# Altium PCB POETIC_Backplane_V2.PcbDoc (part 2 of 2)
Units mm, origin at the board's own origin, x right, y up, seen from the top; angles counter-clockwise.
Board outline 400 x 128 mm, 4 copper layers (Top Layer, Signal Layer 1, Internal Plane 1, Bottom Layer), stack 1.49 mm thick; 36 components, 76 nets, 998 pads, 2 vias.
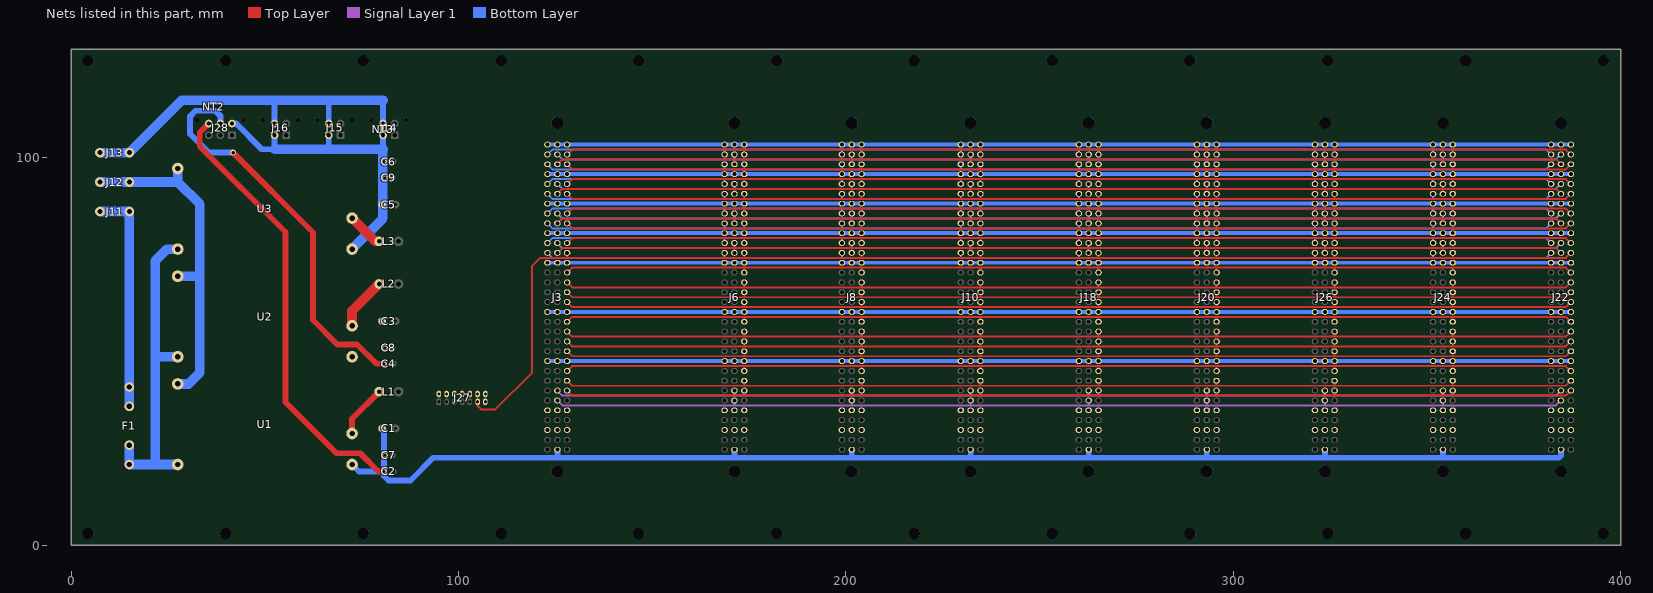
[diagram p4: the nets of this part, all layers, seen from the top]

## Via types
v1: diameter 1.27, hole 0.711, Top Layer to Bottom Layer, tented both sides, 1 vias
v2: diameter 1.5, hole 0.9, Top Layer to Bottom Layer, tented both sides, 1 vias

## Nets (pads, with @x,y where several pads share a name; then routed paths per layer and width w, separated by ;. In a path a pad name is that pad's centre, name@x,y a point inside that pad or via, vN(x,y) a via of type N, cw(c..) or ccw(c..) an arc to the next point about the centre after c; other vN are vias at no path point) (continued)
BP_GPIO_23: J3.B26 J6.B26 J8.B26 J10.B26 J18.B26 J20.B26 J22.B26 J24.B26 J26.B26 | length 268.9
  Signal Layer 1 w0.5: J3.B26@125.48,39.87 126.77,38.58 140.72,38.58 ; 141,38.58 171.2,38.58 ; J6.B26@171.2,39.87 171.2,38.58 ; J8.B26@201.48,39.87 201.48,38.58 ; J10.B26@232.16,39.87 232.16,38.58 ; J18.B26@262.64,39.87 262.64,38.58 ; J20.B26@293.12,39.87 293.12,38.58 ; J26.B26@323.6,39.87 323.6,38.58 ; J24.B26@354.08,39.87 354.08,38.58 ; J22.B26@384.56,39.87 383.27,38.58 354.08,38.58 ; 171.2,38.58 201.48,38.58 ; 201.48,38.58 232.16,38.58 ; 232.16,38.58 262.64,38.58 ; 262.64,38.58 293.12,38.58 ; 293.12,38.58 323.6,38.58 ; 323.6,38.58 354.08,38.58
BP_GPIO_24: J3.B27 J6.B27 J8.B27 J10.B27 J18.B27 J20.B27 J22.B27 J24.B27 J26.B27 | length 268.9
  Signal Layer 1 w0.5: J3.B27@125.48,37.33 126.77,36.04 140.72,36.04 ; 141,36.04 171.2,36.04 ; J6.B27@171.2,37.33 171.2,36.04 ; J8.B27@201.48,37.33 201.48,36.04 ; J10.B27@232.16,37.33 232.16,36.04 ; J18.B27@262.64,37.33 262.64,36.04 ; J20.B27@293.12,37.33 293.12,36.04 ; J26.B27@323.6,37.33 323.6,36.04 ; J24.B27@354.08,37.33 354.08,36.04 ; J22.B27@384.56,37.33 383.27,36.04 354.08,36.04 ; 171.2,36.04 201.48,36.04 ; 201.48,36.04 232.16,36.04 ; 232.16,36.04 262.64,36.04 ; 262.64,36.04 293.12,36.04 ; 293.12,36.04 323.6,36.04 ; 323.6,36.04 354.08,36.04
BP_GPIO_26: J3.C14 J6.C14 J8.C14 J10.C14 J18.C14 J20.C14 J22.C14 J24.C14 J26.C14 | length 269
  Top Layer w0.5: J3.C14@128.02,70.35 129.29,71.62 173.74,71.62 ; J6.C14@173.74,70.35 173.74,71.62 ; J8.C14@204.02,70.35 204.02,71.62 ; J10.C14@234.7,70.35 234.7,71.62 ; J18.C14@265.18,70.35 265.18,71.62 ; J20.C14@295.66,70.35 295.66,71.62 ; J26.C14@326.14,70.35 326.14,71.62 ; J24.C14@356.62,70.35 356.62,71.62 ; J22.C14@387.1,70.35 385.83,71.62 356.62,71.62 ; 173.74,71.62 204.02,71.62 ; 204.02,71.62 234.7,71.62 ; 234.7,71.62 265.18,71.62 ; 265.18,71.62 295.66,71.62 ; 295.66,71.62 326.14,71.62 ; 326.14,71.62 356.62,71.62
BP_GPIO_27: J3.C15 J6.C15 J8.C15 J10.C15 J18.C15 J20.C15 J22.C15 J24.C15 J26.C15 | length 269.2
  Top Layer w0.5: J3.C15@128.02,67.81 129.31,66.52 173.74,66.52 ; J6.C15@173.74,67.81 173.74,66.52 ; J8.C15@204.02,67.81 204.02,66.52 ; J10.C15@234.7,67.81 234.7,66.52 ; J18.C15@265.18,67.81 265.18,66.52 ; J20.C15@295.66,67.81 295.66,66.52 ; J26.C15@326.14,67.81 326.14,66.52 ; J24.C15@356.62,67.81 356.62,66.52 ; J22.C15@387.1,67.81 385.81,66.52 356.62,66.52 ; 173.74,66.52 204.02,66.52 ; 204.02,66.52 234.7,66.52 ; 234.7,66.52 265.18,66.52 ; 265.18,66.52 295.66,66.52 ; 295.66,66.52 326.14,66.52 ; 326.14,66.52 356.62,66.52
BP_GPIO_28: J3.C16 J6.C16 J8.C16 J10.C16 J18.C16 J20.C16 J22.C16 J24.C16 J26.C16 | length 269.2
  Top Layer w0.5: J3.C16@128.02,65.27 129.31,63.98 173.74,63.98 ; J6.C16@173.74,65.27 173.74,63.98 ; J8.C16@204.02,65.27 204.02,63.98 ; J10.C16@234.7,65.27 234.7,63.98 ; J18.C16@265.18,65.27 265.18,63.98 ; J20.C16@295.66,65.27 295.66,63.98 ; J26.C16@326.14,65.27 326.14,63.98 ; J24.C16@356.62,65.27 356.62,63.98 ; J22.C16@387.1,65.27 385.81,63.98 356.62,63.98 ; 173.74,63.98 204.02,63.98 ; 204.02,63.98 234.7,63.98 ; 234.7,63.98 265.18,63.98 ; 265.18,63.98 295.66,63.98 ; 295.66,63.98 326.14,63.98 ; 326.14,63.98 356.62,63.98
BP_GPIO_29: J3.C17 J6.C17 J8.C17 J10.C17 J18.C17 J20.C17 J22.C17 J24.C17 J26.C17 | length 269.2
  Top Layer w0.5: J3.C17@128.02,62.73 129.31,61.44 173.74,61.44 ; J6.C17@173.74,62.73 173.74,61.44 ; J8.C17@204.02,62.73 204.02,61.44 ; J10.C17@234.7,62.73 234.7,61.44 ; J18.C17@265.18,62.73 265.18,61.44 ; J20.C17@295.66,62.73 295.66,61.44 ; J26.C17@326.14,62.73 326.14,61.44 ; J24.C17@356.62,62.73 356.62,61.44 ; J22.C17@387.1,62.73 385.81,61.44 356.62,61.44 ; 173.74,61.44 204.02,61.44 ; 204.02,61.44 234.7,61.44 ; 234.7,61.44 265.18,61.44 ; 265.18,61.44 295.66,61.44 ; 295.66,61.44 326.14,61.44 ; 326.14,61.44 356.62,61.44
BP_GPIO_30: J3.C19 J6.C19 J8.C19 J10.C19 J18.C19 J20.C19 J22.C19 J24.C19 J26.C19 | length 269
  Top Layer w0.5: J3.C19@128.02,57.65 129.29,58.92 173.74,58.92 ; J6.C19@173.74,57.65 173.74,58.92 ; J8.C19@204.02,57.65 204.02,58.92 ; J10.C19@234.7,57.65 234.7,58.92 ; J18.C19@265.18,57.65 265.18,58.92 ; J20.C19@295.66,57.65 295.66,58.92 ; J26.C19@326.14,57.65 326.14,58.92 ; J24.C19@356.62,57.65 356.62,58.92 ; J22.C19@387.1,57.65 385.83,58.92 356.62,58.92 ; 173.74,58.92 204.02,58.92 ; 204.02,58.92 234.7,58.92 ; 234.7,58.92 265.18,58.92 ; 265.18,58.92 295.66,58.92 ; 295.66,58.92 326.14,58.92 ; 326.14,58.92 356.62,58.92
BP_GPIO_31: J3.C20 J6.C20 J8.C20 J10.C20 J18.C20 J20.C20 J22.C20 J24.C20 J26.C20 | length 269.2
  Top Layer w0.5: J3.C20@128.02,55.11 129.31,53.82 173.74,53.82 ; J6.C20@173.74,55.11 173.74,53.82 ; J8.C20@204.02,55.11 204.02,53.82 ; J10.C20@234.7,55.11 234.7,53.82 ; J18.C20@265.18,55.11 265.18,53.82 ; J20.C20@295.66,55.11 295.66,53.82 ; J26.C20@326.14,55.11 326.14,53.82 ; J24.C20@356.62,55.11 356.62,53.82 ; J22.C20@387.1,55.11 385.81,53.82 356.62,53.82 ; 173.74,53.82 204.02,53.82 ; 204.02,53.82 234.7,53.82 ; 234.7,53.82 265.18,53.82 ; 265.18,53.82 295.66,53.82 ; 295.66,53.82 326.14,53.82 ; 326.14,53.82 356.62,53.82
BP_GPIO_32: J3.C21 J6.C21 J8.C21 J10.C21 J18.C21 J20.C21 J22.C21 J24.C21 J26.C21 | length 269.2
  Top Layer w0.5: J3.C21@128.02,52.57 129.31,51.28 173.74,51.28 ; J6.C21@173.74,52.57 173.74,51.28 ; J8.C21@204.02,52.57 204.02,51.28 ; J10.C21@234.7,52.57 234.7,51.28 ; J18.C21@265.18,52.57 265.18,51.28 ; J20.C21@295.66,52.57 295.66,51.28 ; J26.C21@326.14,52.57 326.14,51.28 ; J24.C21@356.62,52.57 356.62,51.28 ; J22.C21@387.1,52.57 385.81,51.28 356.62,51.28 ; 173.74,51.28 204.02,51.28 ; 204.02,51.28 234.7,51.28 ; 234.7,51.28 265.18,51.28 ; 265.18,51.28 295.66,51.28 ; 295.66,51.28 326.14,51.28 ; 326.14,51.28 356.62,51.28
BP_GPIO_33: J3.C22 J6.C22 J8.C22 J10.C22 J18.C22 J20.C22 J22.C22 J24.C22 J26.C22 | length 269.2
  Top Layer w0.5: J3.C22@128.02,50.03 129.31,48.74 173.74,48.74 ; J6.C22@173.74,50.03 173.74,48.74 ; J8.C22@204.02,50.03 204.02,48.74 ; J10.C22@234.7,50.03 234.7,48.74 ; J18.C22@265.18,50.03 265.18,48.74 ; J20.C22@295.66,50.03 295.66,48.74 ; J26.C22@326.14,50.03 326.14,48.74 ; J24.C22@356.62,50.03 356.62,48.74 ; J22.C22@387.1,50.03 385.81,48.74 356.62,48.74 ; 173.74,48.74 204.02,48.74 ; 204.02,48.74 234.7,48.74 ; 234.7,48.74 265.18,48.74 ; 265.18,48.74 295.66,48.74 ; 295.66,48.74 326.14,48.74 ; 326.14,48.74 356.62,48.74
BP_GPIO_34: J3.C24 J6.C24 J8.C24 J10.C24 J18.C24 J20.C24 J22.C24 J24.C24 J26.C24 | length 269
  Top Layer w0.5: J3.C24@128.02,44.95 129.29,46.22 173.74,46.22 ; J6.C24@173.74,44.95 173.74,46.22 ; J8.C24@204.02,44.95 204.02,46.22 ; J10.C24@234.7,44.95 234.7,46.22 ; J18.C24@265.18,44.95 265.18,46.22 ; J20.C24@295.66,44.95 295.66,46.22 ; J26.C24@326.14,44.95 326.14,46.22 ; J24.C24@356.62,44.95 356.62,46.22 ; J22.C24@387.1,44.95 385.83,46.22 356.62,46.22 ; 173.74,46.22 204.02,46.22 ; 204.02,46.22 234.7,46.22 ; 234.7,46.22 265.18,46.22 ; 265.18,46.22 295.66,46.22 ; 295.66,46.22 326.14,46.22 ; 326.14,46.22 356.62,46.22
BP_GPIO_35: J3.C25 J6.C25 J8.C25 J10.C25 J18.C25 J20.C25 J22.C25 J24.C25 J26.C25 | length 269.2
  Top Layer w0.5: J3.C25@128.02,42.41 129.31,41.12 173.74,41.12 ; J6.C25@173.74,42.41 173.74,41.12 ; J8.C25@204.02,42.41 204.02,41.12 ; J10.C25@234.7,42.41 234.7,41.12 ; J18.C25@265.18,42.41 265.18,41.12 ; J20.C25@295.66,42.41 295.66,41.12 ; J26.C25@326.14,42.41 326.14,41.12 ; J24.C25@356.62,42.41 356.62,41.12 ; J22.C25@387.1,42.41 385.81,41.12 356.62,41.12 ; 173.74,41.12 204.02,41.12 ; 204.02,41.12 234.7,41.12 ; 234.7,41.12 265.18,41.12 ; 265.18,41.12 295.66,41.12 ; 295.66,41.12 326.14,41.12 ; 326.14,41.12 356.62,41.12
BP_GPIO_36: J3.C26 J6.C26 J8.C26 J10.C26 J18.C26 J20.C26 J22.C26 J24.C26 J26.C26 | length 269.2
  Top Layer w0.5: J3.C26@128.02,39.87 129.31,38.58 173.74,38.58 ; J6.C26@173.74,39.87 173.74,38.58 ; J8.C26@204.02,39.87 204.02,38.58 ; J10.C26@234.7,39.87 234.7,38.58 ; J18.C26@265.18,39.87 265.18,38.58 ; J20.C26@295.66,39.87 295.66,38.58 ; J26.C26@326.14,39.87 326.14,38.58 ; J24.C26@356.62,39.87 356.62,38.58 ; J22.C26@387.1,39.87 385.81,38.58 356.62,38.58 ; 173.74,38.58 204.02,38.58 ; 204.02,38.58 234.7,38.58 ; 234.7,38.58 265.18,38.58 ; 265.18,38.58 295.66,38.58 ; 295.66,38.58 326.14,38.58 ; 326.14,38.58 356.62,38.58
BP_PWM1A: J3.A2 J6.A2 J8.A2 J10.A2 J18.A2 J20.A2 J22.A2 J24.A2 J26.A2 | length 268.9
  Bottom Layer w0.5: J3.A2@122.94,100.83 124.19,102.08 168.66,102.08 ; J6.A2@168.66,100.83 168.66,102.08 ; J8.A2@198.94,100.83 198.94,102.08 ; J10.A2@229.62,100.83 229.62,102.08 ; J18.A2@260.1,100.83 260.1,102.08 ; J20.A2@290.58,100.83 290.58,102.08 ; J26.A2@321.06,100.83 321.06,102.08 ; J24.A2@351.54,100.83 351.54,102.08 ; J22.A2@382.02,100.83 380.77,102.08 351.54,102.08 ; 168.66,102.08 198.94,102.08 ; 198.94,102.08 229.62,102.08 ; 229.62,102.08 260.1,102.08 ; 260.1,102.08 290.58,102.08 ; 290.58,102.08 321.06,102.08 ; 321.06,102.08 351.54,102.08
BP_PWM1B: J3.A3 J6.A3 J8.A3 J10.A3 J18.A3 J20.A3 J22.A3 J24.A3 J26.A3 | length 269.2
  Bottom Layer w0.5: J3.A3@122.94,98.29 124.23,97 168.66,97 ; J6.A3@168.66,98.29 168.66,97 ; J8.A3@198.94,98.29 198.94,97 ; J10.A3@229.62,98.29 229.62,97 ; J18.A3@260.1,98.29 260.1,97 ; J20.A3@290.58,98.29 290.58,97 ; J26.A3@321.06,98.29 321.06,97 ; J24.A3@351.54,98.29 351.54,97 ; J22.A3@382.02,98.29 380.73,97 351.54,97 ; 168.66,97 198.94,97 ; 198.94,97 229.62,97 ; 229.62,97 260.1,97 ; 260.1,97 290.58,97 ; 290.58,97 321.06,97 ; 321.06,97 351.54,97
BP_PWM2A: J3.A5 J6.A5 J8.A5 J10.A5 J18.A5 J20.A5 J22.A5 J24.A5 J26.A5 | length 268.9
  Bottom Layer w0.5: J3.A5@122.94,93.21 124.19,94.46 168.66,94.46 ; J6.A5@168.66,93.21 168.66,94.46 ; J8.A5@198.94,93.21 198.94,94.46 ; J10.A5@229.62,93.21 229.62,94.46 ; J18.A5@260.1,93.21 260.1,94.46 ; J20.A5@290.58,93.21 290.58,94.46 ; J26.A5@321.06,93.21 321.06,94.46 ; J24.A5@351.54,93.21 351.54,94.46 ; J22.A5@382.02,93.21 380.77,94.46 351.54,94.46 ; 168.66,94.46 198.94,94.46 ; 198.94,94.46 229.62,94.46 ; 229.62,94.46 260.1,94.46 ; 260.1,94.46 290.58,94.46 ; 290.58,94.46 321.06,94.46 ; 321.06,94.46 351.54,94.46
BP_PWM2B: J3.A6 J6.A6 J8.A6 J10.A6 J18.A6 J20.A6 J22.A6 J24.A6 J26.A6 | length 269.2
  Bottom Layer w0.5: J3.A6@122.94,90.67 124.23,89.38 168.66,89.38 ; J6.A6@168.66,90.67 168.66,89.38 ; J8.A6@198.94,90.67 198.94,89.38 ; J10.A6@229.62,90.67 229.62,89.38 ; J18.A6@260.1,90.67 260.1,89.38 ; J20.A6@290.58,90.67 290.58,89.38 ; J26.A6@321.06,90.67 321.06,89.38 ; J24.A6@351.54,90.67 351.54,89.38 ; J22.A6@382.02,90.67 380.73,89.38 351.54,89.38 ; 168.66,89.38 198.94,89.38 ; 198.94,89.38 229.62,89.38 ; 229.62,89.38 260.1,89.38 ; 260.1,89.38 290.58,89.38 ; 290.58,89.38 321.06,89.38 ; 321.06,89.38 351.54,89.38
BP_PWM3A: J3.A8 J6.A8 J8.A8 J10.A8 J18.A8 J20.A8 J22.A8 J24.A8 J26.A8 | length 268.9
  Bottom Layer w0.5: J3.A8@122.94,85.59 124.19,86.84 168.66,86.84 ; J6.A8@168.66,85.59 168.66,86.84 ; J8.A8@198.94,85.59 198.94,86.84 ; J10.A8@229.62,85.59 229.62,86.84 ; J18.A8@260.1,85.59 260.1,86.84 ; J20.A8@290.58,85.59 290.58,86.84 ; J26.A8@321.06,85.59 321.06,86.84 ; J24.A8@351.54,85.59 351.54,86.84 ; J22.A8@382.02,85.59 380.77,86.84 351.54,86.84 ; 168.66,86.84 198.94,86.84 ; 198.94,86.84 229.62,86.84 ; 229.62,86.84 260.1,86.84 ; 260.1,86.84 290.58,86.84 ; 290.58,86.84 321.06,86.84 ; 321.06,86.84 351.54,86.84
BP_PWM3B: J3.A9 J6.A9 J8.A9 J10.A9 J18.A9 J20.A9 J22.A9 J24.A9 J26.A9 | length 269.2
  Bottom Layer w0.5: J3.A9@122.94,83.05 124.23,81.76 168.66,81.76 ; J6.A9@168.66,83.05 168.66,81.76 ; J8.A9@198.94,83.05 198.94,81.76 ; J10.A9@229.62,83.05 229.62,81.76 ; J18.A9@260.1,83.05 260.1,81.76 ; J20.A9@290.58,83.05 290.58,81.76 ; J26.A9@321.06,83.05 321.06,81.76 ; J24.A9@351.54,83.05 351.54,81.76 ; J22.A9@382.02,83.05 380.73,81.76 351.54,81.76 ; 168.66,81.76 198.94,81.76 ; 198.94,81.76 229.62,81.76 ; 229.62,81.76 260.1,81.76 ; 260.1,81.76 290.58,81.76 ; 290.58,81.76 321.06,81.76 ; 321.06,81.76 351.54,81.76
BP_PWM4A: J3.A11 J6.A11 J8.A11 J10.A11 J18.A11 J20.A11 J22.A11 J24.A11 J26.A11 | length 268.9
  Bottom Layer w0.5: J3.A11@122.94,77.97 124.19,79.22 168.66,79.22 ; J6.A11@168.66,77.97 168.66,79.22 ; J8.A11@198.94,77.97 198.94,79.22 ; J10.A11@229.62,77.97 229.62,79.22 ; J18.A11@260.1,77.97 260.1,79.22 ; J20.A11@290.58,77.97 290.58,79.22 ; J26.A11@321.06,77.97 321.06,79.22 ; J24.A11@351.54,77.97 351.54,79.22 ; J22.A11@382.02,77.97 380.77,79.22 351.54,79.22 ; 168.66,79.22 198.94,79.22 ; 198.94,79.22 229.62,79.22 ; 229.62,79.22 260.1,79.22 ; 260.1,79.22 290.58,79.22 ; 290.58,79.22 321.06,79.22 ; 321.06,79.22 351.54,79.22
BP_PWM4B: J3.A12 J6.A12 J8.A12 J10.A12 J18.A12 J20.A12 J22.A12 J24.A12 J26.A12 | length 269.2
  Bottom Layer w0.5: J3.A12@122.94,75.43 124.23,74.14 168.66,74.14 ; J6.A12@168.66,75.43 168.66,74.14 ; J8.A12@198.94,75.43 198.94,74.14 ; J10.A12@229.62,75.43 229.62,74.14 ; J18.A12@260.1,75.43 260.1,74.14 ; J20.A12@290.58,75.43 290.58,74.14 ; J26.A12@321.06,75.43 321.06,74.14 ; J24.A12@351.54,75.43 351.54,74.14 ; J22.A12@382.02,75.43 380.73,74.14 351.54,74.14 ; 168.66,74.14 198.94,74.14 ; 198.94,74.14 229.62,74.14 ; 229.62,74.14 260.1,74.14 ; 260.1,74.14 290.58,74.14 ; 290.58,74.14 321.06,74.14 ; 321.06,74.14 351.54,74.14
BP_PWM5A: J3.B2 J6.B2 J8.B2 J10.B2 J18.B2 J20.B2 J22.B2 J24.B2 J26.B2 | length 269.2
  Bottom Layer w0.5: J3.B2@125.48,100.83 126.77,99.54 171.2,99.54 ; J6.B2@171.2,100.83 171.2,99.54 ; J8.B2@201.48,100.83 201.48,99.54 ; J10.B2@232.16,100.83 232.16,99.54 ; J18.B2@262.64,100.83 262.64,99.54 ; J20.B2@293.12,100.83 293.12,99.54 ; J26.B2@323.6,100.83 323.6,99.54 ; J24.B2@354.08,100.83 354.08,99.54 ; J22.B2@384.56,100.83 383.27,99.54 354.08,99.54 ; 171.2,99.54 201.48,99.54 ; 201.48,99.54 232.16,99.54 ; 232.16,99.54 262.64,99.54 ; 262.64,99.54 293.12,99.54 ; 293.12,99.54 323.6,99.54 ; 323.6,99.54 354.08,99.54
BP_PWM5B: J3.B3 J6.B3 J8.B3 J10.B3 J18.B3 J20.B3 J22.B3 J24.B3 J26.B3 | length 268.9
  Top Layer w0.5: J3.B3@125.48,98.29 126.73,99.54 171.2,99.54 ; J6.B3@171.2,98.29 171.2,99.54 ; J8.B3@201.48,98.29 201.48,99.54 ; J10.B3@232.16,98.29 232.16,99.54 ; J18.B3@262.64,98.29 262.64,99.54 ; J20.B3@293.12,98.29 293.12,99.54 ; J26.B3@323.6,98.29 323.6,99.54 ; J24.B3@354.08,98.29 354.08,99.54 ; J22.B3@384.56,98.29 383.31,99.54 354.08,99.54 ; 171.2,99.54 201.48,99.54 ; 201.48,99.54 232.16,99.54 ; 232.16,99.54 262.64,99.54 ; 262.64,99.54 293.12,99.54 ; 293.12,99.54 323.6,99.54 ; 323.6,99.54 354.08,99.54
BP_PWM6A: J3.B5 J6.B5 J8.B5 J10.B5 J18.B5 J20.B5 J22.B5 J24.B5 J26.B5 | length 269.2
  Bottom Layer w0.5: J3.B5@125.48,93.21 126.77,91.92 171.2,91.92 ; J6.B5@171.2,93.21 171.2,91.92 ; J8.B5@201.48,93.21 201.48,91.92 ; J10.B5@232.16,93.21 232.16,91.92 ; J18.B5@262.64,93.21 262.64,91.92 ; J20.B5@293.12,93.21 293.12,91.92 ; J26.B5@323.6,93.21 323.6,91.92 ; J24.B5@354.08,93.21 354.08,91.92 ; J22.B5@384.56,93.21 383.27,91.92 354.08,91.92 ; 171.2,91.92 201.48,91.92 ; 201.48,91.92 232.16,91.92 ; 232.16,91.92 262.64,91.92 ; 262.64,91.92 293.12,91.92 ; 293.12,91.92 323.6,91.92 ; 323.6,91.92 354.08,91.92
BP_PWM6B: J3.B6 J6.B6 J8.B6 J10.B6 J18.B6 J20.B6 J22.B6 J24.B6 J26.B6 | length 268.9
  Top Layer w0.5: J3.B6@125.48,90.67 126.73,91.92 171.2,91.92 ; J6.B6@171.2,90.67 171.2,91.92 ; J8.B6@201.48,90.67 201.48,91.92 ; J10.B6@232.16,90.67 232.16,91.92 ; J18.B6@262.64,90.67 262.64,91.92 ; J20.B6@293.12,90.67 293.12,91.92 ; J26.B6@323.6,90.67 323.6,91.92 ; J24.B6@354.08,90.67 354.08,91.92 ; J22.B6@384.56,90.67 383.31,91.92 354.08,91.92 ; 171.2,91.92 201.48,91.92 ; 201.48,91.92 232.16,91.92 ; 232.16,91.92 262.64,91.92 ; 262.64,91.92 293.12,91.92 ; 293.12,91.92 323.6,91.92 ; 323.6,91.92 354.08,91.92
BP_PWM7A: J3.B8 J6.B8 J8.B8 J10.B8 J18.B8 J20.B8 J22.B8 J24.B8 J26.B8 | length 269.2
  Bottom Layer w0.5: J3.B8@125.48,85.59 126.77,84.3 171.2,84.3 ; J6.B8@171.2,85.59 171.2,84.3 ; J8.B8@201.48,85.59 201.48,84.3 ; J10.B8@232.16,85.59 232.16,84.3 ; J18.B8@262.64,85.59 262.64,84.3 ; J20.B8@293.12,85.59 293.12,84.3 ; J26.B8@323.6,85.59 323.6,84.3 ; J24.B8@354.08,85.59 354.08,84.3 ; J22.B8@384.56,85.59 383.27,84.3 354.08,84.3 ; 171.2,84.3 201.48,84.3 ; 201.48,84.3 232.16,84.3 ; 232.16,84.3 262.64,84.3 ; 262.64,84.3 293.12,84.3 ; 293.12,84.3 323.6,84.3 ; 323.6,84.3 354.08,84.3
BP_PWM7B: J3.B9 J6.B9 J8.B9 J10.B9 J18.B9 J20.B9 J22.B9 J24.B9 J26.B9 | length 268.9
  Top Layer w0.5: J3.B9@125.48,83.05 126.73,84.3 171.2,84.3 ; J6.B9@171.2,83.05 171.2,84.3 ; J8.B9@201.48,83.05 201.48,84.3 ; J10.B9@232.16,83.05 232.16,84.3 ; J18.B9@262.64,83.05 262.64,84.3 ; J20.B9@293.12,83.05 293.12,84.3 ; J26.B9@323.6,83.05 323.6,84.3 ; J24.B9@354.08,83.05 354.08,84.3 ; J22.B9@384.56,83.05 383.31,84.3 354.08,84.3 ; 171.2,84.3 201.48,84.3 ; 201.48,84.3 232.16,84.3 ; 232.16,84.3 262.64,84.3 ; 262.64,84.3 293.12,84.3 ; 293.12,84.3 323.6,84.3 ; 323.6,84.3 354.08,84.3
BP_PWM8A: J3.B11 J6.B11 J8.B11 J10.B11 J18.B11 J20.B11 J22.B11 J24.B11 J26.B11 | length 269.2
  Bottom Layer w0.5: J3.B11@125.48,77.97 126.77,76.68 171.2,76.68 ; J6.B11@171.2,77.97 171.2,76.68 ; J8.B11@201.48,77.97 201.48,76.68 ; J10.B11@232.16,77.97 232.16,76.68 ; J18.B11@262.64,77.97 262.64,76.68 ; J20.B11@293.12,77.97 293.12,76.68 ; J26.B11@323.6,77.97 323.6,76.68 ; J24.B11@354.08,77.97 354.08,76.68 ; J22.B11@384.56,77.97 383.27,76.68 354.08,76.68 ; 171.2,76.68 201.48,76.68 ; 201.48,76.68 232.16,76.68 ; 232.16,76.68 262.64,76.68 ; 262.64,76.68 293.12,76.68 ; 293.12,76.68 323.6,76.68 ; 323.6,76.68 354.08,76.68
BP_PWM8B: J3.B12 J6.B12 J8.B12 J10.B12 J18.B12 J20.B12 J22.B12 J24.B12 J26.B12 | length 268.9
  Top Layer w0.5: J3.B12@125.48,75.43 126.73,76.68 171.2,76.68 ; J6.B12@171.2,75.43 171.2,76.68 ; J8.B12@201.48,75.43 201.48,76.68 ; J10.B12@232.16,75.43 232.16,76.68 ; J18.B12@262.64,75.43 262.64,76.68 ; J20.B12@293.12,75.43 293.12,76.68 ; J26.B12@323.6,75.43 323.6,76.68 ; J24.B12@354.08,75.43 354.08,76.68 ; J22.B12@384.56,75.43 383.31,76.68 354.08,76.68 ; 171.2,76.68 201.48,76.68 ; 201.48,76.68 232.16,76.68 ; 232.16,76.68 262.64,76.68 ; 262.64,76.68 293.12,76.68 ; 293.12,76.68 323.6,76.68 ; 323.6,76.68 354.08,76.68
BP_PWM9A: J3.C2 J6.C2 J8.C2 J10.C2 J18.C2 J20.C2 J22.C2 J24.C2 J26.C2 | length 269
  Top Layer w0.5: J3.C2@128.02,100.83 129.29,102.1 173.74,102.1 ; J6.C2@173.74,100.83 173.74,102.1 ; J8.C2@204.02,100.83 204.02,102.1 ; J10.C2@234.7,100.83 234.7,102.1 ; J18.C2@265.18,100.83 265.18,102.1 ; J20.C2@295.66,100.83 295.66,102.1 ; J26.C2@326.14,100.83 326.14,102.1 ; J24.C2@356.62,100.83 356.62,102.1 ; J22.C2@387.1,100.83 385.83,102.1 356.62,102.1 ; 173.74,102.1 204.02,102.1 ; 204.02,102.1 234.7,102.1 ; 234.7,102.1 265.18,102.1 ; 265.18,102.1 295.66,102.1 ; 295.66,102.1 326.14,102.1 ; 326.14,102.1 356.62,102.1
BP_PWM9B: J3.C3 J6.C3 J8.C3 J10.C3 J18.C3 J20.C3 J22.C3 J24.C3 J26.C3 | length 269.2
  Top Layer w0.5: J3.C3@128.02,98.29 129.31,97 173.74,97 ; J6.C3@173.74,98.29 173.74,97 ; J8.C3@204.02,98.29 204.02,97 ; J10.C3@234.7,98.29 234.7,97 ; J18.C3@265.18,98.29 265.18,97 ; J20.C3@295.66,98.29 295.66,97 ; J26.C3@326.14,98.29 326.14,97 ; J24.C3@356.62,98.29 356.62,97 ; J22.C3@387.1,98.29 385.81,97 356.62,97 ; 173.74,97 204.02,97 ; 204.02,97 234.7,97 ; 234.7,97 265.18,97 ; 265.18,97 295.66,97 ; 295.66,97 326.14,97 ; 326.14,97 356.62,97
BP_PWM10A: J3.C5 J6.C5 J8.C5 J10.C5 J18.C5 J20.C5 J22.C5 J24.C5 J26.C5 | length 269
  Top Layer w0.5: J3.C5@128.02,93.21 129.29,94.48 173.74,94.48 ; J6.C5@173.74,93.21 173.74,94.48 ; J8.C5@204.02,93.21 204.02,94.48 ; J10.C5@234.7,93.21 234.7,94.48 ; J18.C5@265.18,93.21 265.18,94.48 ; J20.C5@295.66,93.21 295.66,94.48 ; J26.C5@326.14,93.21 326.14,94.48 ; J24.C5@356.62,93.21 356.62,94.48 ; J22.C5@387.1,93.21 385.83,94.48 356.62,94.48 ; 173.74,94.48 204.02,94.48 ; 204.02,94.48 234.7,94.48 ; 234.7,94.48 265.18,94.48 ; 265.18,94.48 295.66,94.48 ; 295.66,94.48 326.14,94.48 ; 326.14,94.48 356.62,94.48
BP_PWM10B: J3.C6 J6.C6 J8.C6 J10.C6 J18.C6 J20.C6 J22.C6 J24.C6 J26.C6 | length 269.2
  Top Layer w0.5: J3.C6@128.02,90.67 129.31,89.38 173.74,89.38 ; J6.C6@173.74,90.67 173.74,89.38 ; J8.C6@204.02,90.67 204.02,89.38 ; J10.C6@234.7,90.67 234.7,89.38 ; J18.C6@265.18,90.67 265.18,89.38 ; J20.C6@295.66,90.67 295.66,89.38 ; J26.C6@326.14,90.67 326.14,89.38 ; J24.C6@356.62,90.67 356.62,89.38 ; J22.C6@387.1,90.67 385.81,89.38 356.62,89.38 ; 173.74,89.38 204.02,89.38 ; 204.02,89.38 234.7,89.38 ; 234.7,89.38 265.18,89.38 ; 265.18,89.38 295.66,89.38 ; 295.66,89.38 326.14,89.38 ; 326.14,89.38 356.62,89.38
BP_PWM11A: J3.C8 J6.C8 J8.C8 J10.C8 J18.C8 J20.C8 J22.C8 J24.C8 J26.C8 | length 269
  Top Layer w0.5: J3.C8@128.02,85.59 129.29,86.86 173.74,86.86 ; J6.C8@173.74,85.59 173.74,86.86 ; J8.C8@204.02,85.59 204.02,86.86 ; J10.C8@234.7,85.59 234.7,86.86 ; J18.C8@265.18,85.59 265.18,86.86 ; J20.C8@295.66,85.59 295.66,86.86 ; J26.C8@326.14,85.59 326.14,86.86 ; J24.C8@356.62,85.59 356.62,86.86 ; J22.C8@387.1,85.59 385.83,86.86 356.62,86.86 ; 173.74,86.86 204.02,86.86 ; 204.02,86.86 234.7,86.86 ; 234.7,86.86 265.18,86.86 ; 265.18,86.86 295.66,86.86 ; 295.66,86.86 326.14,86.86 ; 326.14,86.86 356.62,86.86
BP_PWM11B: J3.C9 J6.C9 J8.C9 J10.C9 J18.C9 J20.C9 J22.C9 J24.C9 J26.C9 | length 269.2
  Top Layer w0.5: J3.C9@128.02,83.05 129.31,81.76 173.74,81.76 ; J6.C9@173.74,83.05 173.74,81.76 ; J8.C9@204.02,83.05 204.02,81.76 ; J10.C9@234.7,83.05 234.7,81.76 ; J18.C9@265.18,83.05 265.18,81.76 ; J20.C9@295.66,83.05 295.66,81.76 ; J26.C9@326.14,83.05 326.14,81.76 ; J24.C9@356.62,83.05 356.62,81.76 ; J22.C9@387.1,83.05 385.81,81.76 356.62,81.76 ; 173.74,81.76 204.02,81.76 ; 204.02,81.76 234.7,81.76 ; 234.7,81.76 265.18,81.76 ; 265.18,81.76 295.66,81.76 ; 295.66,81.76 326.14,81.76 ; 326.14,81.76 356.62,81.76
BP_PWM12A: J3.C11 J6.C11 J8.C11 J10.C11 J18.C11 J20.C11 J22.C11 J24.C11 J26.C11 | length 269
  Top Layer w0.5: J3.C11@128.02,77.97 129.29,79.24 173.74,79.24 ; J6.C11@173.74,77.97 173.74,79.24 ; J8.C11@204.02,77.97 204.02,79.24 ; J10.C11@234.7,77.97 234.7,79.24 ; J18.C11@265.18,77.97 265.18,79.24 ; J20.C11@295.66,77.97 295.66,79.24 ; J26.C11@326.14,77.97 326.14,79.24 ; J24.C11@356.62,77.97 356.62,79.24 ; J22.C11@387.1,77.97 385.83,79.24 356.62,79.24 ; 173.74,79.24 204.02,79.24 ; 204.02,79.24 234.7,79.24 ; 234.7,79.24 265.18,79.24 ; 265.18,79.24 295.66,79.24 ; 295.66,79.24 326.14,79.24 ; 326.14,79.24 356.62,79.24
BP_PWM12B_BN_PWM: J3.C12 J6.C12 J8.C12 J10.C12 J18.C12 J20.C12 J22.C12 J24.C12 J26.C12 J27.11 | length 326.9
  Top Layer w0.5: J27.11@104.9,37 104.9,35.9 105.8,35 109.5,35 119,44.5 119,72.1 121.04,74.14 128.02,74.14 ; J3.C12@128.02,75.43 128.02,74.14 ; J6.C12@173.74,75.43 173.74,74.14 ; J8.C12@204.02,75.43 204.02,74.14 ; J10.C12@234.7,75.43 234.7,74.14 ; J18.C12@265.18,75.43 265.18,74.14 ; J20.C12@295.66,75.43 295.66,74.14 ; J26.C12@326.14,75.43 326.14,74.14 ; J24.C12@356.62,75.43 356.62,74.14 ; J22.C12@387.13,75.4 J22.C12@387.1,75.43 385.81,74.14 356.62,74.14 ; 128.02,74.14 173.74,74.14 ; 173.74,74.14 204.02,74.14 ; 204.02,74.14 234.7,74.14 ; 234.7,74.14 265.18,74.14 ; 265.18,74.14 295.66,74.14 ; 295.66,74.14 326.14,74.14 ; 326.14,74.14 356.62,74.14
EARTH: J13.1 J13.2 J14.4 J15.4 J16.4 NT2.2 NT3.2 | length 97.2
  Bottom Layer w0.5: J14.4@80.5,107.8 J14.4@80.5,108.8
  Bottom Layer w1.5: J16.4@52.5,108.8 52.5,114.8 ; J15.4@66.5,108.8 66.5,114.8 ; J14.4@80.5,108.8 80.5,114.8
  Bottom Layer w2.5: J13.1@7.9,101.3 J13.2@15,101.3 28.5,114.8 38.5,114.8 52.5,114.8 66.5,114.8 80.5,114.8
GND_+24V_BP: C1.2 C2.1 C7.2 J3.B32 J6.B32 J8.B32 J10.B32 J18.B32 J20.B32 J22.B32 J24.B32 J26.B32 J28.6 U1.4 | length 459.7
  Top Layer w1.5: J28.6@35.5,108.8 33.2,106.5 33.2,102.9 55.3,80.8 55.3,36.9 68.5,23.7 74.6,23.7 79.3,19 C2.1@80.75,19
  Bottom Layer w1.5: U1.4@72.5,20.8 74.3,19 C2.1@80.25,19 ; C1.2@80.25,30.1 80.75,29.6 C2.1@80.75,19 80.75,17.85 81.9,16.7 87.58,16.7 93.4,22.52 110.26,22.52 ; 110.3,22.52 125.3,22.52 ; J3.B32@125.5,24.63 125.5,22.52 140.5,22.52 ; 140.74,22.52 155.98,22.52 ; 156,22.52 171.22,22.52 J6.B32@171.22,24.63 ; 171.3,22.52 186.4,22.52 ; 186.46,22.52 201.4,22.52 ; J8.B32@201.5,24.63 201.5,22.52 216.8,22.52 ; 216.94,22.52 232.1,22.52 ; J10.B32@232.18,24.63 232.18,22.52 247.42,22.52 ; 247.5,22.52 262.5,22.52 ; J18.B32@262.66,24.63 262.66,22.52 293,22.52 ; J20.B32@293.14,24.63 293.14,22.52 323.6,22.52 ; J26.B32@323.62,24.63 323.62,22.52 338.86,22.52 ; 339,22.52 354.1,22.52 ; J24.B32@354.1,24.63 354.1,22.52 ; 369.3,22.52 354.1,22.52 ; 369.34,22.52 384.02,22.52 384.6,23.1 384.6,24.61 J22.B32@384.58,24.63
GND_A: C5.2 C6.1 C9.2 J14.2 J15.2 J16.2 J28.4 NT3.1 U3.4 | length 82.6
  Bottom Layer w0.5: J14.2@80.5,105.8 NT3.1@80.5,106.8
  Bottom Layer w1.5: J28.4@41.5,108.8 42.6,108.8 49.2,102.2 52.5,102.2 J16.2@52.5,105.8 ; 66.5,102.2 J15.2@66.5,105.8 ; 80.5,102.2 J14.2@80.5,105.8
  Bottom Layer w2.5: 52.5,102.2 66.5,102.2 80.45,102.2 ; U3.4@72.5,76.4 80.45,84.35 80.45,94.8 80.45,102.2 ; 80.5,102.2 80.45,102.2
GND_BP: C3.2 C4.1 C8.2 J3.A1 J3.A4 J3.A7 J3.A10 J3.A13 J3.A18 J3.A23 J3.A28 J3.A30 J3.B1 J3.B4 J3.B7 J3.B10 J3.B13 J3.B18 J3.B23 J3.B28 J3.B30 J3.C1 J3.C4 J3.C7 J3.C10 J3.C13 J3.C18 J3.C23 J3.C28 J3.C30 J6.A1 J6.A4 J6.A7 J6.A10 J6.A13 J6.A18 J6.A23 J6.A28 J6.A30 J6.B1 J6.B4 J6.B7 J6.B10 J6.B13 J6.B18 J6.B23 J6.B28 J6.B30 J6.C1 J6.C4 J6.C7 J6.C10 J6.C13 J6.C18 J6.C23 J6.C28 J6.C30 J8.A1 J8.A4 J8.A7 J8.A10 J8.A13 J8.A18 J8.A23 J8.A28 J8.A30 J8.B1 J8.B4 J8.B7 J8.B10 J8.B13 J8.B18 J8.B23 J8.B28 J8.B30 J8.C1 J8.C4 J8.C7 J8.C10 J8.C13 J8.C18 J8.C23 J8.C28 J8.C30 J10.A1 J10.A4 J10.A7 J10.A10 J10.A13 J10.A18 J10.A23 J10.A28 J10.A30 J10.B1 J10.B4 J10.B7 J10.B10 J10.B13 J10.B18 J10.B23 J10.B28 J10.B30 J10.C1 J10.C4 J10.C7 J10.C10 J10.C13 J10.C18 J10.C23 J10.C28 J10.C30 J18.A1 J18.A4 J18.A7 J18.A10 J18.A13 J18.A18 J18.A23 J18.A28 J18.A30 J18.B1 J18.B4 J18.B7 J18.B10 J18.B13 J18.B18 J18.B23 J18.B28 J18.B30 J18.C1 J18.C4 J18.C7 J18.C10 J18.C13 J18.C18 J18.C23 J18.C28 J18.C30 J20.A1 J20.A4 J20.A7 J20.A10 J20.A13 J20.A18 J20.A23 J20.A28 J20.A30 J20.B1 J20.B4 J20.B7 J20.B10 J20.B13 J20.B18 J20.B23 J20.B28 J20.B30 J20.C1 J20.C4 J20.C7 J20.C10 J20.C13 J20.C18 J20.C23 J20.C28 J20.C30 J22.A1 J22.A4 J22.A7 J22.A10 J22.A13 J22.A18 J22.A23 J22.A28 J22.A30 J22.B1 J22.B4 J22.B7 J22.B10 J22.B13 J22.B18 J22.B23 J22.B28 J22.B30 J22.C1 J22.C4 J22.C7 J22.C10 J22.C13 J22.C18 J22.C23 J22.C28 J22.C30 J24.A1 J24.A4 J24.A7 J24.A10 J24.A13 J24.A18 J24.A23 J24.A28 J24.A30 J24.B1 J24.B4 J24.B7 J24.B10 J24.B13 J24.B18 J24.B23 J24.B28 J24.B30 J24.C1 J24.C4 J24.C7 J24.C10 J24.C13 J24.C18 J24.C23 J24.C28 J24.C30 J26.A1 J26.A4 J26.A7 J26.A10 J26.A13 J26.A18 J26.A23 J26.A28 J26.A30 J26.B1 J26.B4 J26.B7 J26.B10 J26.B13 J26.B18 J26.B23 J26.B28 J26.B30 J26.C1 J26.C4 J26.C7 J26.C10 J26.C13 J26.C18 J26.C23 J26.C28 J26.C30 J27.2 J27.4 J27.6 J27.8 J27.10 J27.12 J27.13 J27.14 J28.5 NT2.1 U2.4 | length 1952.5
  Top Layer w1.5: v2(41.8,101.3) 62.4,80.7 62.4,58.1 68.7,51.8 73.8,51.8 78.8,46.8 C4.1@80.75,46.8
  Bottom Layer w1: J3.A23@122.94,47.49 J6.A23@168.66,47.49 J8.A23@198.94,47.49 J10.A23@229.62,47.49 J18.A23@260.1,47.49 J20.A23@290.58,47.49 J26.A23@321.06,47.49 J24.A23@351.54,47.49 J22.A23@382.02,47.49 J22.C23@387.1,47.49 ; J3.A18@122.94,60.19 J6.A18@168.66,60.19 J6.C18@173.74,60.19 J8.A18@198.94,60.19 J10.A18@229.62,60.19 J18.A18@260.1,60.19 J20.A18@290.58,60.19 J26.A18@321.06,60.19 J24.A18@351.54,60.19 J22.A18@382.02,60.19 J22.C18@387.1,60.19 ; J3.A13@122.94,72.89 J6.A13@168.66,72.89 J8.A13@198.94,72.89 J8.B13@201.48,72.89 J10.A13@229.62,72.89 J10.C13@234.7,72.89 J18.A13@260.1,72.89 J20.A13@290.58,72.89 J26.A13@321.06,72.89 J24.A13@351.54,72.89 J22.A13@382.02,72.89 J22.C13@387.1,72.89 ; J3.A10@122.94,80.51 J6.A10@168.66,80.51 J8.A10@198.94,80.51 J8.B10@201.48,80.51 J10.A10@229.62,80.51 J18.A10@260.1,80.51 J20.A10@290.58,80.51 J26.A10@321.06,80.51 J24.A10@351.54,80.51 J22.A10@382.02,80.51 J22.C10@387.1,80.51 ; J3.A7@122.94,88.13 J6.A7@168.66,88.13 J8.A7@198.94,88.13 J10.A7@229.62,88.13 J18.A7@260.1,88.13 J20.A7@290.58,88.13 J26.A7@321.06,88.13 J24.A7@351.54,88.13 J22.A7@382.02,88.13 J22.C7@387.1,88.13 ; J3.A4@122.94,95.75 J6.A4@168.66,95.75 J8.A4@198.94,95.75 J10.A4@229.62,95.75 J18.A4@260.1,95.75 J20.A4@290.58,95.75 J26.A4@321.06,95.75 J26.C4@326.14,95.75 J24.A4@351.54,95.75 J22.A4@382.02,95.75 J22.C4@387.1,95.75 ; J3.A1@122.94,103.37 J6.A1@168.66,103.37 J8.A1@198.94,103.37 J10.A1@229.62,103.37 J18.A1@260.1,103.37 J20.A1@290.58,103.37 J26.A1@321.06,103.37 J24.A1@351.54,103.37 J22.A1@382.02,103.37 J22.C1@387.1,103.37
  Bottom Layer w1.5: J28.5@38.5,108.8 38.5,110.8 37.2,112.1 32.1,112.1 30.7,110.7 30.7,106.1 35.5,101.3 v2(41.8,101.3)
NetF1_1: F1.1 J11.1 J11.2 | length 57.4
  Bottom Layer w2.5: J11.1@7.9,86.1 J11.2@15,86.1 F1.1@15,40.8 F1.1@15,35.8
NetF1_2: F1.2 U1.1 U2.1 U3.1 | length 82.9
  Bottom Layer w2.5: F1.2@15,25.8 F1.2@15,20.8 21.7,20.8 ; U1.1@27.5,20.8 21.7,20.8 ; U2.1@27.5,48.6 21.7,48.6 ; U3.1@27.5,76.4 24.7,76.4 21.7,73.4 21.7,48.6 ; 21.7,20.8 21.7,48.6
NetJ12_1: J12.1 J12.2 U1.2 U2.2 U3.2 | length 87.8
  Bottom Layer w2.5: J12.1@7.4,93.7 J12.2@15,93.7 27.5,93.7 ; U1.2@27.5,41.6 30.3,41.6 33.2,44.5 33.2,69.4 ; U2.2@27.5,69.4 33.2,69.4 ; U3.2@27.5,97.2 27.5,93.7 ; 27.5,93.7 33.2,88 33.2,69.4
NetL1_1: L1.1 U1.3 | length 13.7
  Top Layer w1.5: U1.3@72.5,28.8 72.5,32.6 L1.1@79.5,39.6
NetL2_1: L2.1 U2.3 | length 13.7
  Top Layer w2.5: U2.3@72.5,56.6 72.5,60.4 L2.1@79.5,67.4
NetL3_1: L3.1 U3.3 | length 9.5
  Top Layer w2.5: U3.3@72.5,84.4 78.5,78.4 L3.1@79.5,78.4
pads on no net: J3.0 J6.0 J8.0 J10.0 J14.0 J15.0 J16.0 J18.0 J20.0 J22.0 J24.0 J26.0 J28.0

## Polygon pours and split planes (outlines as drawn)
no net on Internal Plane 1 (split plane): 87.998,121 87.998,74.002 66.597,74.002 66.597,102.5 33,102.5 33,121
GND_BP on Internal Plane 1 (split plane): 397.498,121 397.498,25.5 88.498,25.5 88.498,41.002 85.5,44 66.597,44 66.597,71.998 89,71.998 89.131,72.006 89.259,72.032 89.384,72.074 89.501,72.132 89.61,72.205 89.709,72.291 89.795,72.39 89.868,72.499 89.926,72.616 89.968,72.741 89.994,72.869 90.002,73 90.002,121

## Other copper
Internal Plane 1 (plane layer: these items are gaps in the copper):
  pour cut-out: 0.4,127.6 399.6,127.6 399.6,121 33,121 33,102.5 66.597,102.5 66.597,44 85.5,44 88.498,41.002 88.498,25.5 399.6,25.5 399.598,0.5 0.4,0.4
  lines w2: 1,122 1,6 398.5,6 398.5,122 ; 65.1,73 89,73 89,122 ; 89,122 89,122

## Silkscreen, mask and mechanical layers (free items; w line width, h text height)
Top Overlay:
  text "E" at 18.5,97.5 h1.5
  text "N" at 18.5,89.5 h1.5
  text "L" at 18.5,82 h1.5
  text "HES-SO VALAIS WALLIS / POETIC BACKPLANE / V2.0 01.07.2019 ARC" at 12.1,45.5 h1.5 r90
  text "630mA" at 10.8,27.2 h1.5 r90
Mechanical 1:
  the board outline again, w0.15